# Altium PCB PCICARD32x2-Template.PcbDoc
Units mm, origin at the board's own origin, x right, y up, seen from the top; angles counter-clockwise.
Board outline 143 x 69.4 mm, 4 copper layers (Top Layer, Int1 (PWR), Int2 (GND), Bottom Layer), stack 1.588 mm thick; 3 components, 171 nets, 66 pads, 0 vias.
Unrouted connection lines stored in the file: 12.
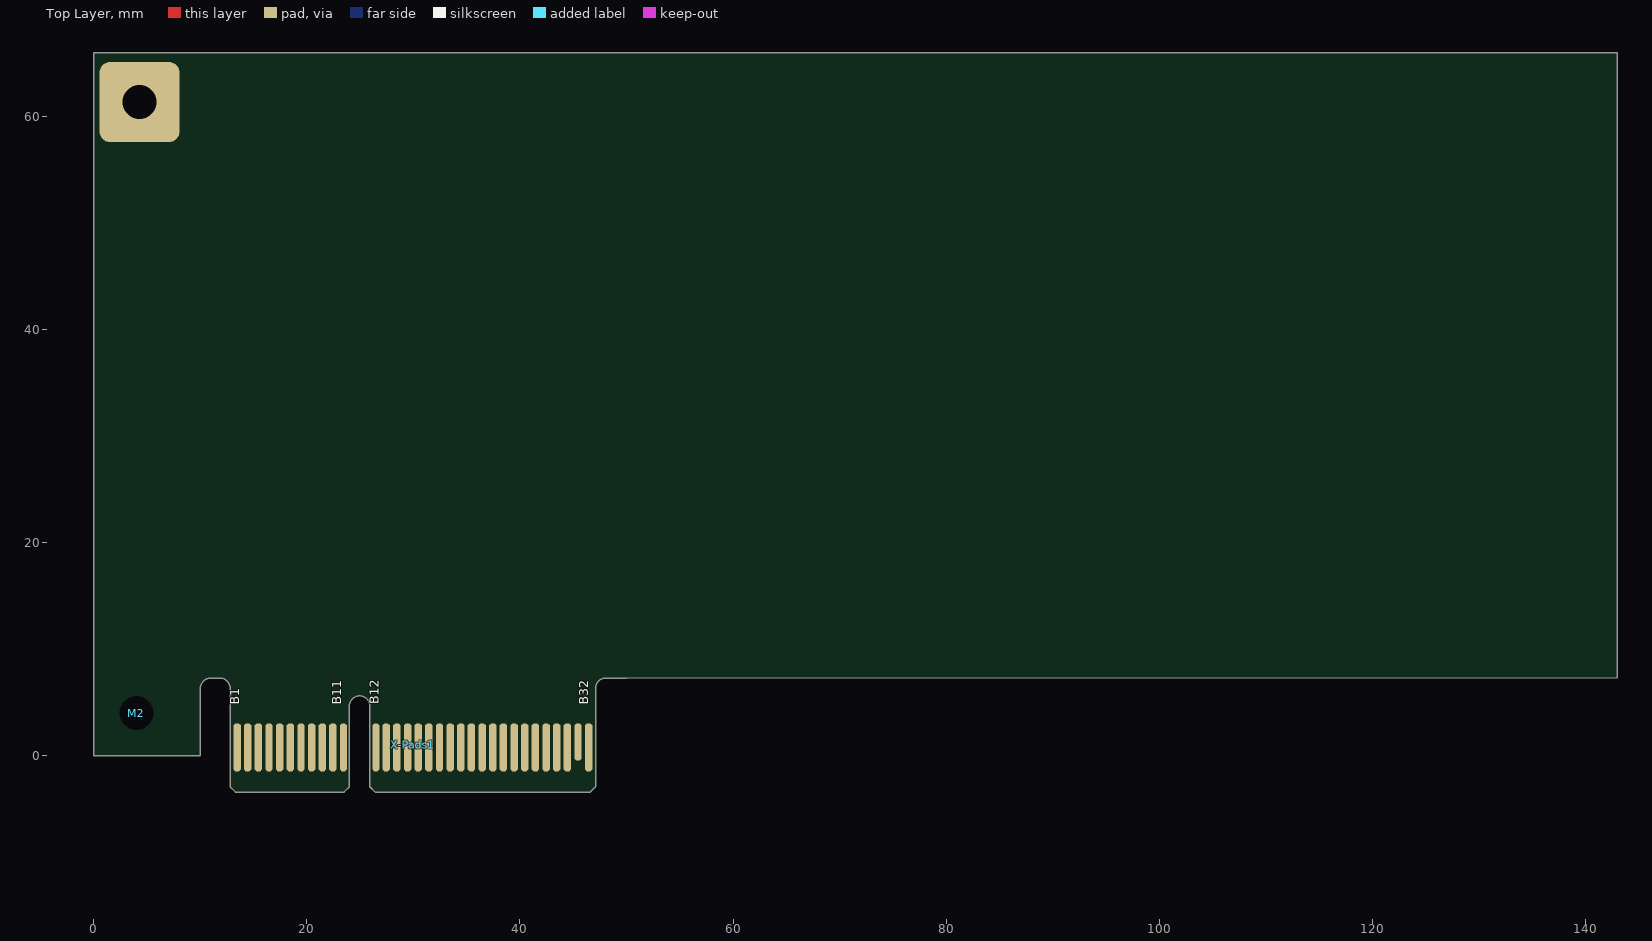
[diagram p0: Top Layer view]
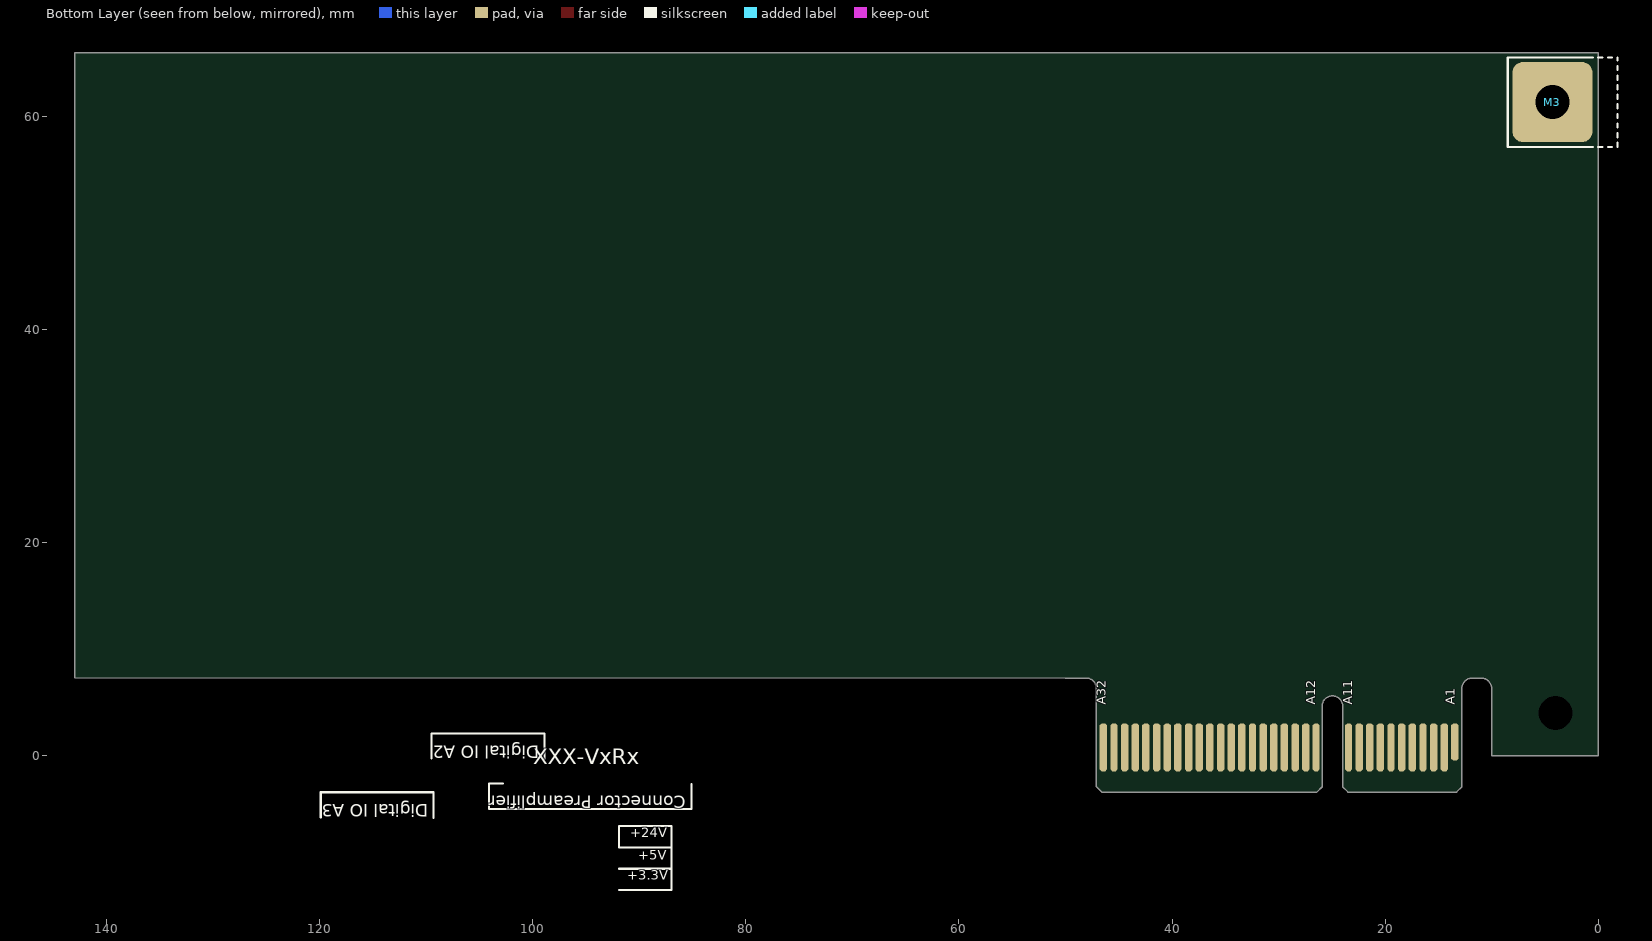
[diagram p1: Bottom Layer view, seen from below]
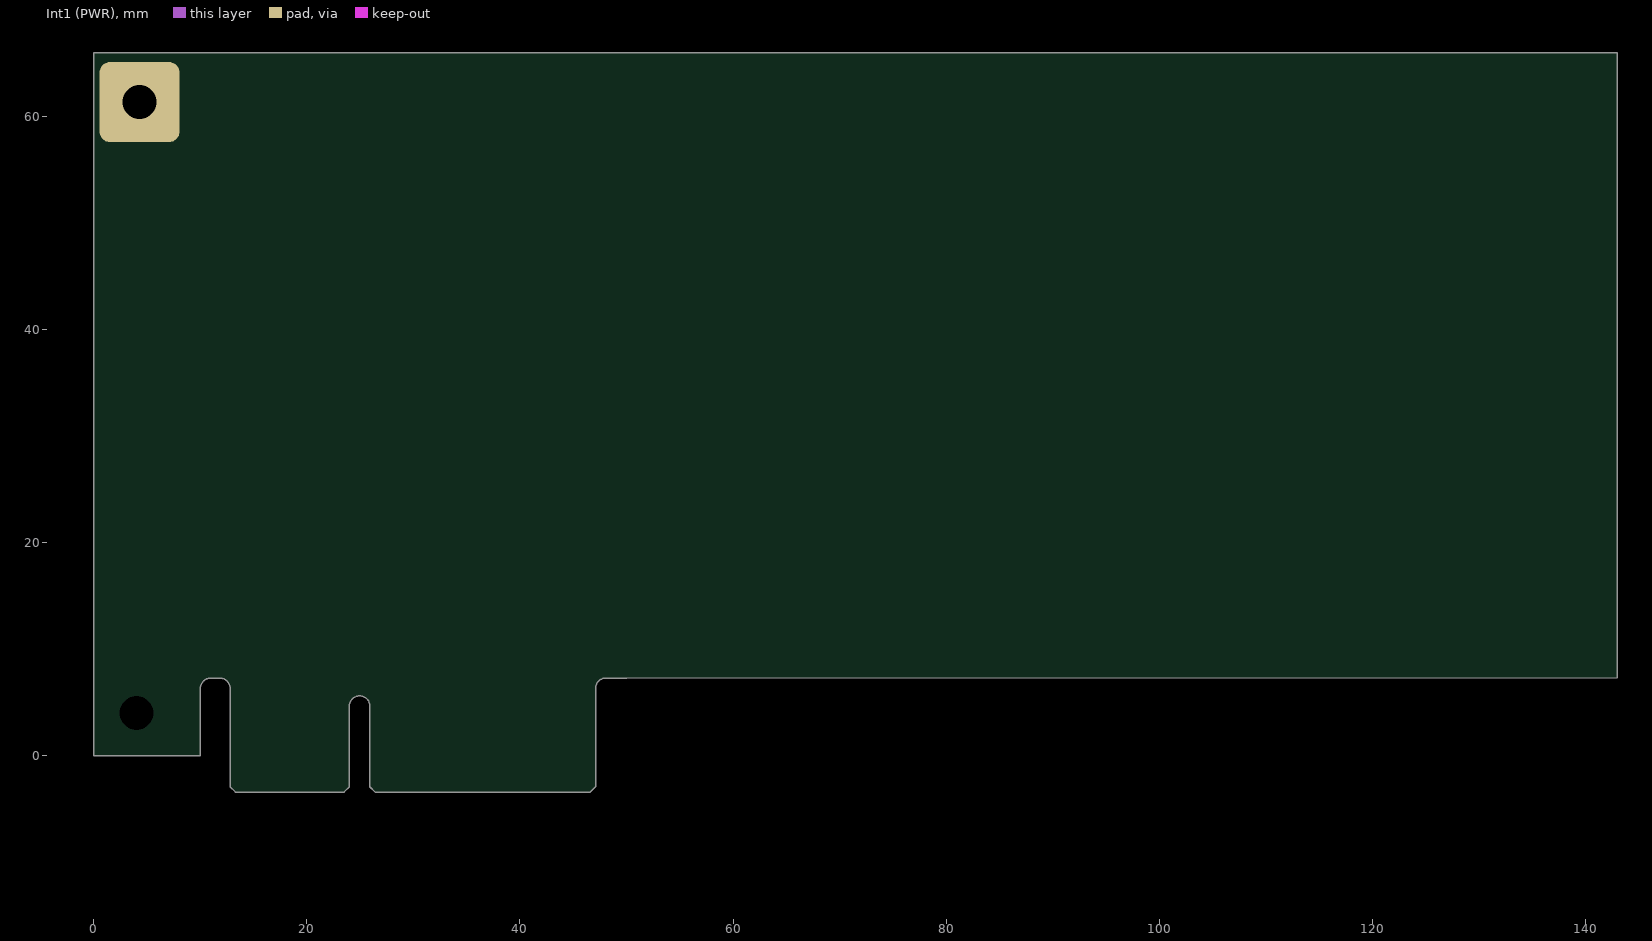
[diagram p2: Int1 (PWR)]
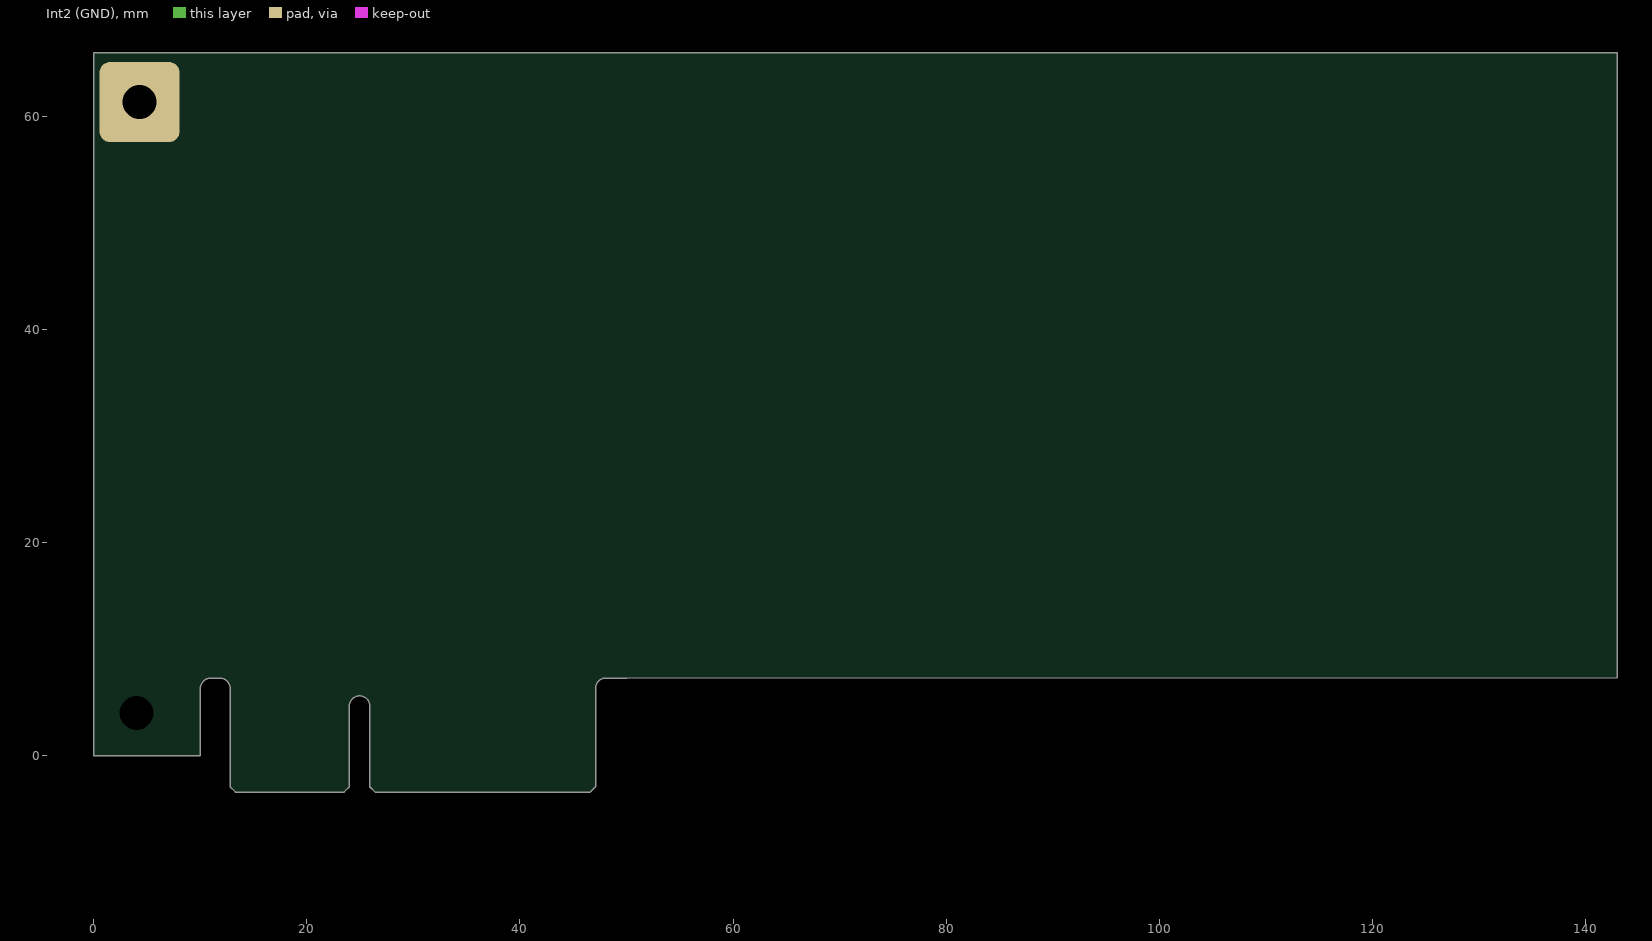
[diagram p3: Int2 (GND)]

## Layer stack, top to bottom
Top Solder: solder mask 0.0254, SM-001, Dk 4
Top Layer: signal copper 0.05
Dielectric 1: prepreg 0.1, PP-014, Dk 4.2
Dielectric 2: prepreg 0.209, PP-022, Dk 4.5
Int1 (PWR): signal copper 0.035
Dielectric 3: core 0.8, Core-042, Dk 4.6
Int2 (GND): signal copper 0.035
Dielectric 4: prepreg 0.209, PP-022, Dk 4.5
Dielectric 5: prepreg 0.1, PP-014, Dk 4.2
Bottom Layer: signal copper 0.05
Bottom Solder: solder mask 0.0254, SM-001, Dk 4

## Board outline
50,7.298 143,7.309 143,66 0,66 0,0 10,0 10,6.3 cw(c10.998,6.3) 10.998,7.298 11.801,7.299 cw(c11.833,6.333) 12.8,6.3 12.8,-2.9 13.3,-3.4 23.5,-3.4 24,-2.9 24,4.812 cw(c24.95,4.66) 25.9,4.812 25.9,-2.9 26.4,-3.4 46.6,-3.4 47.1,-2.9 47.1,6.332 cw(c48.068,6.332) 48.133,7.298

## Design rules (kind name [scope] priority, off if disabled: settings)
BoardOutlineClearance [All] p1: gap=0.4 ignorepadtopadclearanceinfootprint=FALSE except(0: Arc-SplitContinuation Track-SplitContinuation SMDPad-SplitContinuation THPad-SplitContinuation Via-SplitContinuation Fill-SplitContinuation Poly-SplitContinuation Region-SplitContinuation Text-SplitContinuation)
Clearance [All] p1: gap=0.2 ignorepadtopadclearanceinfootprint=FALSE except(0: Arc-Hole Track-Hole SMDPad-Hole THPad-Hole Via-Hole Fill-Hole Poly-Hole Region-Hole Text-Hole)
HoleSize [All] p1: absolutevalues=TRUE maxlimit=4 minlimit=0.025 maxpercent=80.000 minpercent=20.000
HoleToHoleClearance [All] p1: gap=0.1 allowstackedmicrovias=TRUE
MinimumSolderMaskSliver [All] p1: minsoldermaskwidth=0.07
PolygonConnect [All] p1: connectstyle=Direct reliefconductorwidth=0.3 reliefentries=4 polygonreliefangle="90 Angle" airgapwidth=0.3
RoutingVias [All] p1: holewidth=0.2 width=0.6 viastyle="Through Hole" minholewidth=0.3 minwidth=0.6 maxholewidth=5 maxwidth=10
SilkToSilkClearance [All] p1: silktosilkclearance=0.1
SilkToSolderMaskClearance [IsPad] p1: minsilkscreentomaskgap=0.1 clearancetoexposedcopper=TRUE
SolderMaskExpansion [All] p1: expansion=0.06 istentingtop=FALSE
Width [All] p1: maxlimit=10 minlimit=0.2 preferedwidth=0.3
25 further rules are at their usual default settings.

## Components (designator, comment, footprint, x,y, rotation, side; value= is the part's Value field where it differs from the comment)
M2 "Drill 3.2mm / no Restring" Mountingholes_M3_NotPlated 4,4 r0 top locked
M3 "Drill 3.2mm / Restring 6mm" Mountingholes_M3_Plated-MBracket 4.3,61.35 r90 bottom locked
X-Pads1 "PCI Express Pads on PCB" PCI_EXPRESS_64_PADS 13.45,0.8 r0 top

## Footprints (in the part's own frame and the unit in brackets; to place one, negate y for a bottom-side part, rotate by r counter-clockwise, add the part's x,y. Pads: shape width x height; smd on the part's side, far side on the other; paste and mask are expansions set on the pad)
Mountingholes_M3_NotPlated [mm] "M3"
  round 0 hole 3.2 unplated: 1(0,0)
Mountingholes_M3_Plated-MBracket [mm] "M3"
  rrect25% 7.5x7.5 hole 3.2: 1(0,0)
  silkscreen extent -4.2,-6.1 4.2,4.2, body extent -3.5,-6 3.5,3.5, height 9.6
PCI_EXPRESS_64_PADS [mm] "PCI Express PCB Pads 64"
  oct 0.7x3.5 smd far side paste-5: A1(0,0.5)
  oct 0.7x4.5 smd far side paste-5: A2(1,0) A3(2,0) A4(3,0) A5(4,0) A6(5,0) A7(6,0) A8(7,0) A9(8,0) A10(9,0) A13(14,0) A14(15,0) A15(16,0) A16(17,0) A17(18,0) A18(19,0) A19(20,0) A20(21,0) A21(22,0) A22(23,0) A23(24,0) A24(25,0) A25(26,0) A26(27,0) A27(28,0) A28(29,0) A29(30,0) A30(31,0) A31(32,0) A32(33,0)
  oct 0.65x4.5 smd far side: A11(9.975,0) A12(13.025,0)
  oct 0.7x4.5 smd paste-5: B1(0,0) B2(1,0) B3(2,0) B4(3,0) B5(4,0) B6(5,0) B7(6,0) B8(7,0) B9(8,0) B10(9,0) B13(14,0) B14(15,0) B15(16,0) B16(17,0) B17(18,0) B18(19,0) B19(20,0) B20(21,0) B21(22,0) B22(23,0) B23(24,0) B24(25,0) B25(26,0) B26(27,0) B27(28,0) B28(29,0) B29(30,0) B30(31,0) B32(33,0)
  oct 0.65x4.5 smd paste-5: B11(9.975,0) B12(13.025,0)
  oct 0.7x3.5 smd paste-5: B31(32,0.5)
  body extent -0.35,-2.25 33.35,2.25, height 0.02

## Part data
M2: library part Mountinghole_M3_notplated, "Drill 3.2mm / Restring 6mm"
M3: library part Mountinghole_M3_Mounting-Bracket
X-Pads1: library part PCI_Connector_64PINs_AB

## Nets (pads, with @x,y where several pads share a name; then routed paths per layer and width w, separated by ;. In a path a pad name is that pad's centre, name@x,y a point inside that pad or via, vN(x,y) a via of type N, cw(c..) or ccw(c..) an arc to the next point about the centre after c; other vN are vias at no path point)
+3.3V: 
+4V: 
+5V: 
+24V: 
+24V_EXT: 
ADC_CLK: 
ADC_CS: 
ADC_MISO: 
ADC_RDY: 
ADC_VALID: 
BMA1: 
BMA2: 
BMB1: 
BMB2: 
CA1: 
CA2: 
CB1: 
CB2: 
CLK_out: 
CLK_Y: 
CONV: 
DI_LAMP-Ready: 
DO_LampONOFF: 
DO_Lifting-Magnet: 
DO_Valve: 
GND: X-Pads1.A2 X-Pads1.A5 X-Pads1.A7 X-Pads1.A13 X-Pads1.A15 X-Pads1.B1 X-Pads1.B7 X-Pads1.B13 X-Pads1.B16 X-Pads1.B25 X-Pads1.B26 X-Pads1.B29 X-Pads1.B30
GPDIO_GPA2: 
GPDIO_GPA3: 
GPDIO_GPA4: 
GPDIO_GPA5: 
GPDIO_GPA6: 
HA1: 
HA2: 
HB1: 
HB2: 
LA1: 
LA2: 
LB1: 
LB2: 
LOAD: 
NetC5_1: 
NetC5_2: 
NetC8_2: 
NetC9_2: 
NetC10_2: 
NetC11_2: 
NetC12_2: 
NetC13_2: 
NetC22_2: X-Pads1.A29
NetC24_1: 
NetC24_2: 
NetC29_1: 
NetC29_2: 
NetC33_2: 
NetC34_2: 
NetC36_2: 
NetC38_2: 
NetC41_1: 
NetC43_2: 
NetC52_1: 
NetC61_1: 
NetC62_1: 
NetC64_1: 
NetC65_1: 
NetD3_2: 
NetD4_2: 
NetD6_3: 
NetD7_3: 
NetD8_3: 
NetIC1_4: 
NetIC1_5: 
NetIC2_1: 
NetIC2_2: 
NetIC2_5: 
NetIC2_6: 
NetIC2_7: 
NetIC2_8: 
NetIC2_19: 
NetIC2_28: 
NetIC3_4: 
NetIC4_4: 
NetIC4_6: 
NetIC6_1: 
NetIC6_19: 
NetIC7_1: 
NetIC7_3: 
NetIC9_13: 
NetIC9_14: 
NetIC9_16: 
NetIC9_26: 
NetIC9_27: 
NetIC10_3: 
NetIC10_4: 
NetIC11_3: 
NetIC12_13: 
NetIC13_13: 
NetIC14_11: 
NetIC15_7: 
NetL1_2: X-Pads1.B12
NetL2_1: X-Pads1.A12
NetL3_2: X-Pads1.B27
NetL4_2: X-Pads1.B28
NetL5_2: X-Pads1.B31
NetL6_2: X-Pads1.B32
NetLED1_1K: 
NetLED2_1K: 
NetLED3_1K: 
NetQ1_4: 
NetQ2_4: 
NetQ3_4: 
NetQ4_4: 
NetQ5_4: 
NetQ6_4: 
NetQ7_4: 
NetQ8_4: 
NetQ9_4: 
NetQ10_4: 
NetR2_2: X-Pads1.B20
NetR4_2: 
NetR8_1: 
NetR28_1: X-Pads1.A22
NetR29_1: X-Pads1.A32
NetR30_1: X-Pads1.A28
NetR31_1: X-Pads1.A30
NetR32_1: X-Pads1.A23
NetR33_1: X-Pads1.A24
NetR35_1: X-Pads1.B19
NetR39_2: 
NetX11_2: 
NetX11_6: 
NetX-Pads1_A1: X-Pads1.A1
NetX-Pads1_A3: X-Pads1.A3
NetX-Pads1_A4: X-Pads1.A4
NetX-Pads1_A6: X-Pads1.A6
NetX-Pads1_A10: X-Pads1.A10
NetX-Pads1_A11: X-Pads1.A11
NetX-Pads1_A20: X-Pads1.A20
NetX-Pads1_A21: X-Pads1.A21
NetX-Pads1_A25: X-Pads1.A25
NetX-Pads1_A26: X-Pads1.A26
NetX-Pads1_A27: X-Pads1.A27
NetX-Pads1_B10: X-Pads1.B10
NetX-Pads1_B11: X-Pads1.B11
NetX-Pads1_B14: X-Pads1.B14
NetX-Pads1_B15: X-Pads1.B15
NetX-Pads1_B21: X-Pads1.B21
NetX-Pads1_B22: X-Pads1.B22
NetX-Pads1_B23: X-Pads1.B23
NetX-Pads1_B24: X-Pads1.B24
REFL_STEP: 
REFR_DIR: 
RS485-TR-N: 
RS485-TR-P: 
SD_MODE: 
SPI1_A_CLK: 
SPI1_A_CS2: 
SPI1_A_CS3: 
SPI1_A_CS4: 
SPI1_A_MISO: 
SPI1_A_MOSI: 
SPI1_CLK: 
SPI1_CS2: 
SPI1_CS3: 
SPI1_CS4: 
SPI1_MISO: 
SPI1_MOSI: 
SPI_MODE: 
SRAH: 
SRAL: 
SRBH: 
SRBL: 
pads on no net: M2.1 M3.1 X-Pads1.A8 X-Pads1.A9 X-Pads1.A14 X-Pads1.A16 X-Pads1.A17 X-Pads1.A18 X-Pads1.A19 X-Pads1.A31 X-Pads1.B2 X-Pads1.B3 X-Pads1.B4 X-Pads1.B5 X-Pads1.B6 X-Pads1.B8 X-Pads1.B9 X-Pads1.B17 X-Pads1.B18

## Polygon pours and split planes (outlines as drawn)
no net on Top Milling "NONET_L03_P-001" (hatched Horizontal grid 0.508 track 0.203): 56.025,66 56.025,-1.8 56.625,-3.4 57.925,-3.4 58.525,-1.8 58.525,66
no net on Top Milling "NONET_L03_P-001" (solid): 25.95,-1.6 25.95,-2.9 26.45,-3.4 46.6,-3.4 47.1,-2.9 47.1,-1.6
no net on Top Milling "NONET_L03_P-001" (solid): 12.8,-1.7
no net on Top Milling "NONET_L03_P-001" (solid): 12.822,-1.6 12.822,-2.9 13.322,-3.4 23.472,-3.4 23.972,-2.9 23.972,-1.6
no net on Top Milling "NONET_L03_P-001" (solid): 25.875,-3
no net on Top Milling "NONET_L03_P-001" (solid): 14.7,-3
no net on Mechanical 16 "NONET_L03_P-001" (hatched Horizontal grid 0.508 track 0.203): 72.7,27.902 72.7,22.202 79.216,22.202 79.216,27.902
no net on Mechanical 16 "NONET_L03_P-001" (hatched Horizontal grid 0.508 track 0.203): 22.774,-28.702 46.889,-28.702 48.774,-33.434 50.658,-28.702 74.774,-28.702 74.774,-40.202 50.658,-40.202 48.774,-34.934 46.889,-40.202 22.774,-40.202
no net on Bottom Milling "NONET_L03_P-001" (solid): 12.822,-1.6 12.822,-2.9 13.322,-3.4 23.472,-3.4 23.972,-2.9 23.972,-1.6
no net on Bottom Milling "NONET_L03_P-001" (hatched Horizontal grid 0.508 track 0.203): 56.025,66 56.025,-1.8 56.625,-3.4 57.925,-3.4 58.525,-1.8 58.525,66
no net on Bottom Milling "NONET_L03_P-001" (solid): 25.95,-1.6 25.95,-2.9 26.45,-3.4 46.6,-3.4 47.1,-2.9 47.1,-1.6

## Other copper
Top Layer:
  pour cut-out: 52.5,7.3 52.5,7.7 53,8.2 57,8.2 57.5,7.7 57.5,7.3
  pour cut-out: 135.5,7.3 135.5,7.7 136,8.2 140,8.2 140.5,7.7 140.5,7.3
  pour cut-out: 92.5,7.3 92.5,7.7 93,8.2 97,8.2 97.5,7.7 97.5,7.3
  pour cut-out: 52.5,7
  pour cut-out: 52.5,7.4
Int1 (PWR):
  pour cut-out: 52.5,7.3 52.5,7.7 53,8.2 57,8.2 57.5,7.7 57.5,7.3
  pour cut-out: 135.5,7.3 135.5,7.7 136,8.2 140,8.2 140.5,7.7 140.5,7.3
  pour cut-out: 92.5,7.3 92.5,7.7 93,8.2 97,8.2 97.5,7.7 97.5,7.3
Int2 (GND):
  pour cut-out: 52.5,7.3 52.5,7.7 53,8.2 57,8.2 57.5,7.7 57.5,7.3
  pour cut-out: 135.5,7.3 135.5,7.7 136,8.2 140,8.2 140.5,7.7 140.5,7.3
  pour cut-out: 92.5,7.3 92.5,7.7 93,8.2 97,8.2 97.5,7.7 97.5,7.3
Bottom Layer:
  pour cut-out: 8.5,57.1 8.5,66 0,66 0,57.1
  pour cut-out: 52.5,7.3 52.5,7.7 53,8.2 57,8.2 57.5,7.7 57.5,7.3
  pour cut-out: 135.5,7.3 135.5,7.7 136,8.2 140,8.2 140.5,7.7 140.5,7.3
  pour cut-out: 92.5,7.3 92.5,7.7 93,8.2 97,8.2 97.5,7.7 97.5,7.3

## Silkscreen, mask and mechanical layers (free items; w line width, h text height)
Bottom Overlay:
  lines w0.2: 85.1,-2.664 85.1,-5 104.1,-5 104.1,-2.6 102.8,-2.6 ; 86.975,-10.6 90.95,-10.6 ; 86.975,-8.6 90.95,-8.6 ; 91.9,-12.6 90.95,-12.6 ; 91.9,-10.6 90.95,-10.6 ; 98.9,-0.3 98.9,2.1 109.5,2.1 109.5,-0.236 ; 109.3,-5.825 109.3,-3.425 119.9,-3.425 119.9,-5.761 ; 90.95,-12.6 90.95,-12.6 ; 90.95,-12.6 86.975,-12.6 86.975,-6.6 90.95,-6.6 91.9,-6.6 91.9,-8.6 90.95,-8.6 ; 90.95,-10.6 90.95,-10.6 ; 90.95,-8.6 90.95,-8.6 ; 90.95,-8.6 90.95,-8.6
  text "Digital IO A2" at 99.4,1.367 h2 r180
  text "XXX-VxRx" at 99.935,-1.308 h2.5
  text "Connector Preamplifier" at 85.631,-3.324 h2 r180
  text "Digital IO A3" at 109.798,-4.133 h2 r180
  text "+24V" at 90.84,-7.986 h1.5
  text "+5V" at 90.085,-10.074 h1.5
  text "+3.3V" at 91.116,-11.98 h1.5
Top Milling:
  lines w0.01: 23.95,-1.7 23.95,3.75 23.95,4.5 cw(c24.95,4.5) 24.95,5.5 ; 47.1,-1.79 47.1,6.325 ; 12.8,-1.7 ccw(c12.8,-1.7) 12.8,-1.7 ; 12.8,-1.7 12.8,6.34 ccw(c11.84,6.34) 11.84,7.3 11.024,7.3 ccw(c11.024,6.276) 10,6.276 10,0 0,0 0,66 143,66 143,7.3 48.125,7.3 48.075,7.3 ccw(c48.075,6.325) 47.1,6.325 ; 24.95,5.5 cw(c24.95,4.5) 25.95,4.5 25.95,-1.7 ; 24.95,5.5 24.95,5.5 ; 25.95,-1.7 ccw(c25.95,-1.7) 25.95,-1.7 ; 47.1,6.325 ccw(c47.1,6.325) 47.1,6.325
  lines w0.2: 48.025,-3 55.525,-3 ; 48.025,3.5 55.525,3.5 ; 54.925,-3.5 55.525,-3 ; 54.925,-2.5 55.525,-3 ; 55.025,3 55.525,3.5 ; 55.025,4 55.525,3.5 ; 58.525,-1.8 58.6,-13.3
  text "Note: Please see PCI Express Card Electromechanical Specifications" at 17.593,71.748 h4
  text "Note: HighTech Production Capabilities Page 4 (Chamfer / Bevel)" at 61.493,-7.667 h2
Bottom Assembly:
  lines w0.2: 24.9,5.5 cw(c24.9,4.5) 25.9,4.5 25.9,-2.5 26.4,-3 46.6,-3 47.1,-2.5 47.1,6.4 cw(c48,6.4) 48,7.3 143,7.3 143,66 0,66 0,0 10,0 10,6.4 cw(c10.9,6.4) 10.9,7.3 11.9,7.3 cw(c11.9,6.4) 12.8,6.4 12.8,-2.5 13.3,-3 23.5,-3 23.9,-2.5 23.9,4.5 cw(c24.9,4.5) 24.9,5.5 ; 24.9,5.5 24.9,5.5
Bottom Milling:
  lines w0.01: 23.95,-1.7 23.95,3.75 23.95,4.5 cw(c24.95,4.5) 24.95,5.5 ; 47.1,-1.79 47.1,6.325 ; 12.8,-1.7 ccw(c12.8,-1.7) 12.8,-1.7 ; 12.8,-1.7 12.8,6.34 ccw(c11.84,6.34) 11.84,7.3 11.024,7.3 ccw(c11.024,6.276) 10,6.276 10,0 0,0 0,66 143,66 143,7.3 48.125,7.3 48.075,7.3 ccw(c48.075,6.325) 47.1,6.325 ; 24.95,5.5 cw(c24.95,4.5) 25.95,4.5 25.95,-1.7 ; 24.95,5.5 24.95,5.5 ; 25.95,-1.7 ccw(c25.95,-1.7) 25.95,-1.7 ; 47.1,6.325 ccw(c47.1,6.325) 47.1,6.325
  lines w0.2: 48.025,-3 55.525,-3 ; 48.025,3.5 55.525,3.5 ; 54.925,-3.5 55.525,-3 ; 54.925,-2.5 55.525,-3 ; 55.025,3 55.525,3.5 ; 55.025,4 55.525,3.5 ; 58.525,-1.8 58.6,-13.3
  text "Note: Please see PCI Express Card Electromechanical Specifications" at 17.593,71.748 h4
  text "Note: HighTech Production Capabilities Page 4 (Chamfer / Bevel)" at 61.493,-7.667 h2
Mechanical 16:
  drawing of 411 lines, arcs and shapes, not listed
  text "Note: Please use Stackup enclosed to this order (HighTech Stackup)." at 12.283,124.31 h0.8
  text "Layer" at 17.111,122.778 h1.52
  text "Name" at 27.522,122.778 h1.52
  text "Material" at 51.138,122.778 h1.52
  text "Thickness" at 66.374,122.778 h1.52
  text "Constant" at 82.88,122.778 h1.52
  text "Board Layer Stack" at 97.354,122.778 h1.52
  text "Top Overlay" at 27.522,119.73 h1.52
  text "Top Solder" at 27.522,116.682 h1.52
  text "SM-001" at 51.138,116.682 h1.52
  text "0,025mm" at 66.374,116.682 h1.52
  text "4" at 82.88,116.682 h1.52
  text "1" at 17.111,113.634 h1.52
  text "Top Layer" at 27.522,113.634 h1.52
  text "Copper" at 51.138,113.634 h1.52
  text "0,050mm" at 66.374,113.634 h1.52
  text "Dielectric 1" at 27.522,110.586 h1.52
  text "PP-014" at 51.138,110.586 h1.52
  text "0,100mm" at 66.374,110.586 h1.52
  text "4,2" at 82.88,110.586 h1.52
  text "Dielectric 2" at 27.522,107.538 h1.52
  text "PP-022" at 51.138,107.538 h1.52
  text "0,209mm" at 66.374,107.538 h1.52
  text "4,5" at 82.88,107.538 h1.52
  text "2" at 17.111,104.49 h1.52
  text "Int1 (PWR)" at 27.522,104.49 h1.52
  text "Copper" at 51.138,104.49 h1.52
  text "0,035mm" at 66.374,104.49 h1.52
  text "Dielectric 3" at 27.522,101.442 h1.52
  text "Core-042" at 51.138,101.442 h1.52
  text "0,800mm" at 66.374,101.442 h1.52
  text "4,6" at 82.88,101.442 h1.52
  text "3" at 17.111,98.394 h1.52
  text "Int2 (GND)" at 27.522,98.394 h1.52
  text "Copper" at 51.138,98.394 h1.52
  text "0,035mm" at 66.374,98.394 h1.52
  text "Dielectric 4" at 27.522,95.346 h1.52
  text "PP-022" at 51.138,95.346 h1.52
  text "0,209mm" at 66.374,95.346 h1.52
  text "4,5" at 82.88,95.346 h1.52
  text "Dielectric 5" at 27.522,92.298 h1.52
  text "PP-014" at 51.138,92.298 h1.52
  text "0,100mm" at 66.374,92.298 h1.52
  text "4,2" at 82.88,92.298 h1.52
  text "4" at 17.111,89.25 h1.52
  text "Bottom Layer" at 27.522,89.25 h1.52
  text "Copper" at 51.138,89.25 h1.52
  text "0,050mm" at 66.374,89.25 h1.52
  text "Bottom Solder" at 27.522,86.202 h1.52
  text "SM-001" at 51.138,86.202 h1.52
  text "0,025mm" at 66.374,86.202 h1.52
  text "4" at 82.88,86.202 h1.52
  text "Bottom Overlay" at 27.522,83.154 h1.52
  text "[Gerber] .variantname  / .gbr                Top Layer, L1                              / .gbr                Layer 1, L2 / .gbr                Layer 2,L3                           / .gbr                Bottom Layer, L4                           / .gbr                Bottom Pad Master                        / .gbr                Top Pad Master                           / .gbr                Bottom Overlay                           / .gbr                Bottom Solder                            / .gbr                Bottom Paste                             / .gbr                Top Overlay                              / .gbr                Top Paste                                / .gbr                Top Solder                               / .gbr                Top Milling Information = Mechanical 4 / .gbr                Bottom Milling Information = Mechanical 7   / .gbr                Panel Information = Mechanical 17 / .gbr                Mechanical 16, Placement Logo, Stackup, PCB-Specifikation, Contact to Engineer                 / .gbr                Profile = Board Outline                                 / .gbr                Non-plated through-hole drill file       / .gbr                Plated through-hole drill file           / .gbr                Drill Drawing                            / .gbr                Drill Guide" at 159.4,77.2 h1.52
  text "[PCB - Specifikation] / 1. PCB Size 143 x 69.4mm, FR4 /    Panel Size 99.4 x 173.5mm Single PCB in each panel, add copper balance inner layers. / 2. X / 3. Finished Thickness to be [1.6 +/-2.5%] mm  / 4. Board Finish: Immersion Gold (ENIG) / 5. Soldermask - green, Top/Bottom / 6. Silkscreen Bottom only, white / 7. Panel = Yes, one PCB in one Panel see 12 / 8. Layer = 4 Cu (see Layerstack encl.) / 9. UL Flammclass use hole Logo on Silkscreen Bottom layer, for placement see Mechanical 16. / 10. Feature: (Chamfer & Bevel) / Milling please check \"PCI Express Card Electromechanical Specification\" and Millinglayers.  / 11. Given Stackup is an Altium example please use HighTech Stackup enclosed. / 12. Panel definitions: See Panel Layer use Milling and V-Cuts as shown." at 162.7,5.7 h1.52
  text "See Milling!!!" at 59.679,1.158 h2
  text "TDX Boards" at 164.8,-6.25 h1.52
  text "Variant Name:" at 185.104,-6.396 h1.52
  text "UV-DetectorBoard V8R1" at 204.754,-6.446 h1.52
  text "Copyright:" at 165.05,-10.25 h1.52
  text "Sykam GmbH, Gewerbering 15, D-86922 Eresing" at 180.3,-10.25 h1.52
  text "Contact: stephan.diel@sykam.com +49-(0)-8193-938 19" at 165.05,-14.25 h1.52
  text "Placement area for HighTech UL_logo-full" at 138.938,-23.267 h0.8
  text "Note: place logo here  / same Rotation and same Layer as Sykam logo." at 146.066,-29.623 h0.8
  text "U" at 138.306,-29.783 h6
Panel:
  circle w0.1: c138.375,7.6 r0.257
  circle w0.1: c93.795,7.598 r0.257
  circle w0.1: c55.401,7.599 r0.257
  circle w0.1: c57.001,7.399 r0.257
  circle w0.1: c53.001,7.399 r0.257
  circle w0.1: c139.175,7.6 r0.257
  circle w0.1: c137.575,7.6 r0.257
  circle w0.1: c136.775,7.6 r0.257
  circle w0.1: c96.195,7.598 r0.257
  circle w0.1: c94.595,7.598 r0.257
  circle w0.1: c95.395,7.598 r0.257
  circle w0.1: c56.201,7.599 r0.257
  circle w0.1: c54.601,7.599 r0.257
  circle w0.1: c53.801,7.599 r0.257
  circle w0.1: c139.975,7.4 r0.257
  circle w0.1: c135.975,7.4 r0.257
  circle w0.1: c96.995,7.398 r0.257
  circle w0.1: c92.995,7.398 r0.257
  lines w0.2: -24.95,66.1 -14.45,66.1 ; -17.025,65.65 -16.125,66.1 -17.025,66.55 ; -15,66.1 158.6,66.1 ; -0.55,-20.325 -0.1,-19.425 0.35,-20.325 ; -0.55,83.025 -0.1,82.125 ; -0.1,-28.25 -0.1,-17.75 ; -0.1,-18.3 -0.1,81.1 ; -0.1,80.45 -0.1,90.95 ; -0.1,81.65 -0.1,82.125 ; 0.35,83.025 -0.1,82.125 ; 48.85,-4.25 48.225,-3.625 ; 69.55,-6.475 66.7,-3.625 48.225,-3.625 ; 95.825,5.325 95.4,6.35 ; 96.325,5.925 95.4,6.35 ; 99.112,2.663 96.95,4.825 96.925,4.825 95.4,6.35 ; 142.65,-20.325 143.1,-19.425 143.55,-20.325 ; 142.65,83.025 143.1,82.125 ; 143.1,-28.25 143.1,-17.75 ; 143.1,-18.3 143.1,81.1 ; 143.1,80.45 143.1,90.95 ; 143.1,81.65 143.1,82.125 ; 143.55,83.025 143.1,82.125 ; 157.95,66.1 168.45,66.1 ; 159.15,66.1 159.625,66.1 ; 160.175,70.9 159.55,71.525 ; 160.525,65.65 159.625,66.1 ; 160.525,66.55 159.625,66.1 ; 180.875,68.675 178.025,71.525 159.55,71.525 ; 48.225,-3.625 48.225,-3.625 ; 48.225,-3.625 48.85,-3 ; 48.85,-3 48.85,-3 ; 159.55,71.525 160.175,72.15 ; 160.175,72.15 160.175,72.15
  lines w1: -15,-18.4 158.5,-18.4 158.5,81 123.5,81 -15,81 -15,-18.4
  lines w1.2: -1.325,-0.6 2.3,-0.6 ; 2.5,-0.6 10.6,-0.6 10.6,6.3 cw(c11.005,6.3) 10.719,6.586 cw(c10.993,6.312) 10.993,6.7 11.859,6.7 cw(c11.859,6.359) 12.1,6.6 cw(c11.859,6.359) 12.2,6.359 12.2,-1.3 12.2,-2.7 13.1,-3.6 23.7,-3.6 24.533,-2.767 24.533,4.433 cw(c25.076,4.433) 24.692,4.817 cw(c24.892,4.618) 24.892,4.9 24.984,4.9 cw(c24.984,4.559) 25.225,4.8 cw(c24.917,4.492) 25.353,4.492 25.353,-1.593 cw(c25.343,-1.593) 25.35,-1.6 25.35,-2.75 26.025,-3.425 26.2,-3.6 46.85,-3.6 47.7,-2.75 47.7,6.35 cw(c48.002,6.35) 47.788,6.563 cw(c48.118,6.234) 48.118,6.7 52.2,6.7 ; 57.8,6.7 92.2,6.7 ; 97.775,6.7 135.175,6.7 ; 140.775,6.7 144.6,6.7
  text "V-Cut" at 0.4,91.759 h1 r90
  text "V-Cut" at 143.6,91.759 h1 r90
  text "V-Cut" at -30.091,65.6 h1
  text "V-Cut" at 169.259,65.6 h1
  text "Note: Paneloutline, no Text,  / no Logo, no Fiducials, no Drills / on the panel it required. For / manufacturing add copper balance / in Inner Layers." at 181.1,57.1 h1
  text "Mouse bites: 6 x Drill, d = 0.6mm,  / Placement as shown." at 97.627,-0.842 h1
  text "Milling about 1.2mm or 2mm" at 70.229,-7.233 h1
  text "Note: V-CUT according to HighTech Guide Page 5" at 23.011,-27.5 h1.5
  text "V-Cut" at -0.6,-29.059 h1 r270
  text "V-Cut" at 142.6,-29.059 h1 r270

## Dimensions
12.85,-2.55 to 13.35,-3.05 on Top Milling
12.5,-1.5 to 13.322,-3.4 on Top Milling
58.525,-1.8 to 57.925,-3.4 on Top Milling
58.525,-1.8 to 57.925,-3.4 on Bottom Milling
0,66 to 13.295,-3.4 on Mechanical 16
25,4.7 to 28.6,6.2 on Mechanical 16
12.8,-2.498 to 24,-2.9 on Mechanical 16
24,-2.9 to 25.9,-2.9 on Mechanical 16
-15,81 to -15,-18.4 on Mechanical 16
-15,81 to 158.5,81 on Mechanical 16
12.5,-1.5 to 13.322,-3.4 on Bottom Milling
12.85,-2.55 to 13.35,-3.05 on Bottom Milling
0,0 to 47.1,-2.5 on Mechanical 16
11.024,6.276 to 8.3,12.6 on Mechanical 16
48.124,6.276 to 47.3,10.2 on Mechanical 16
12.795,-2.9 to 13.295,-3.4 on Mechanical 16
143,66 to 143,7.309 on Mechanical 16
0,66 to 143,66 on Mechanical 16
0,66 to 0,0 on Mechanical 16
47.1,-2.9 to 143,7.309 on Mechanical 16
0,0 to 10,0 on Mechanical 16

## Text inside footprints (layer, text, board x,y; h text height)
X-Pads1: Bottom Overlay "A1" at 13.2,4.8 h1.45 r270; Bottom Overlay "A32" at 45.95,4.804 h1.45 r270; Bottom Overlay "A12" at 26.3,4.8 h1.45 r270; Bottom Overlay "A11" at 22.8,4.8 h1.45 r270; Top Overlay "B32" at 46.688,4.8 h1.45 r90; Top Overlay "B12" at 27.046,4.816 h1.45 r90; Top Overlay "B11" at 23.533,4.794 h1.45 r90; Top Overlay "B1" at 13.945,4.8 h1.45 r90